# EAGLE board slab-main-pcb-open-source-board-mx-routed (EAGLE 9.7.0)
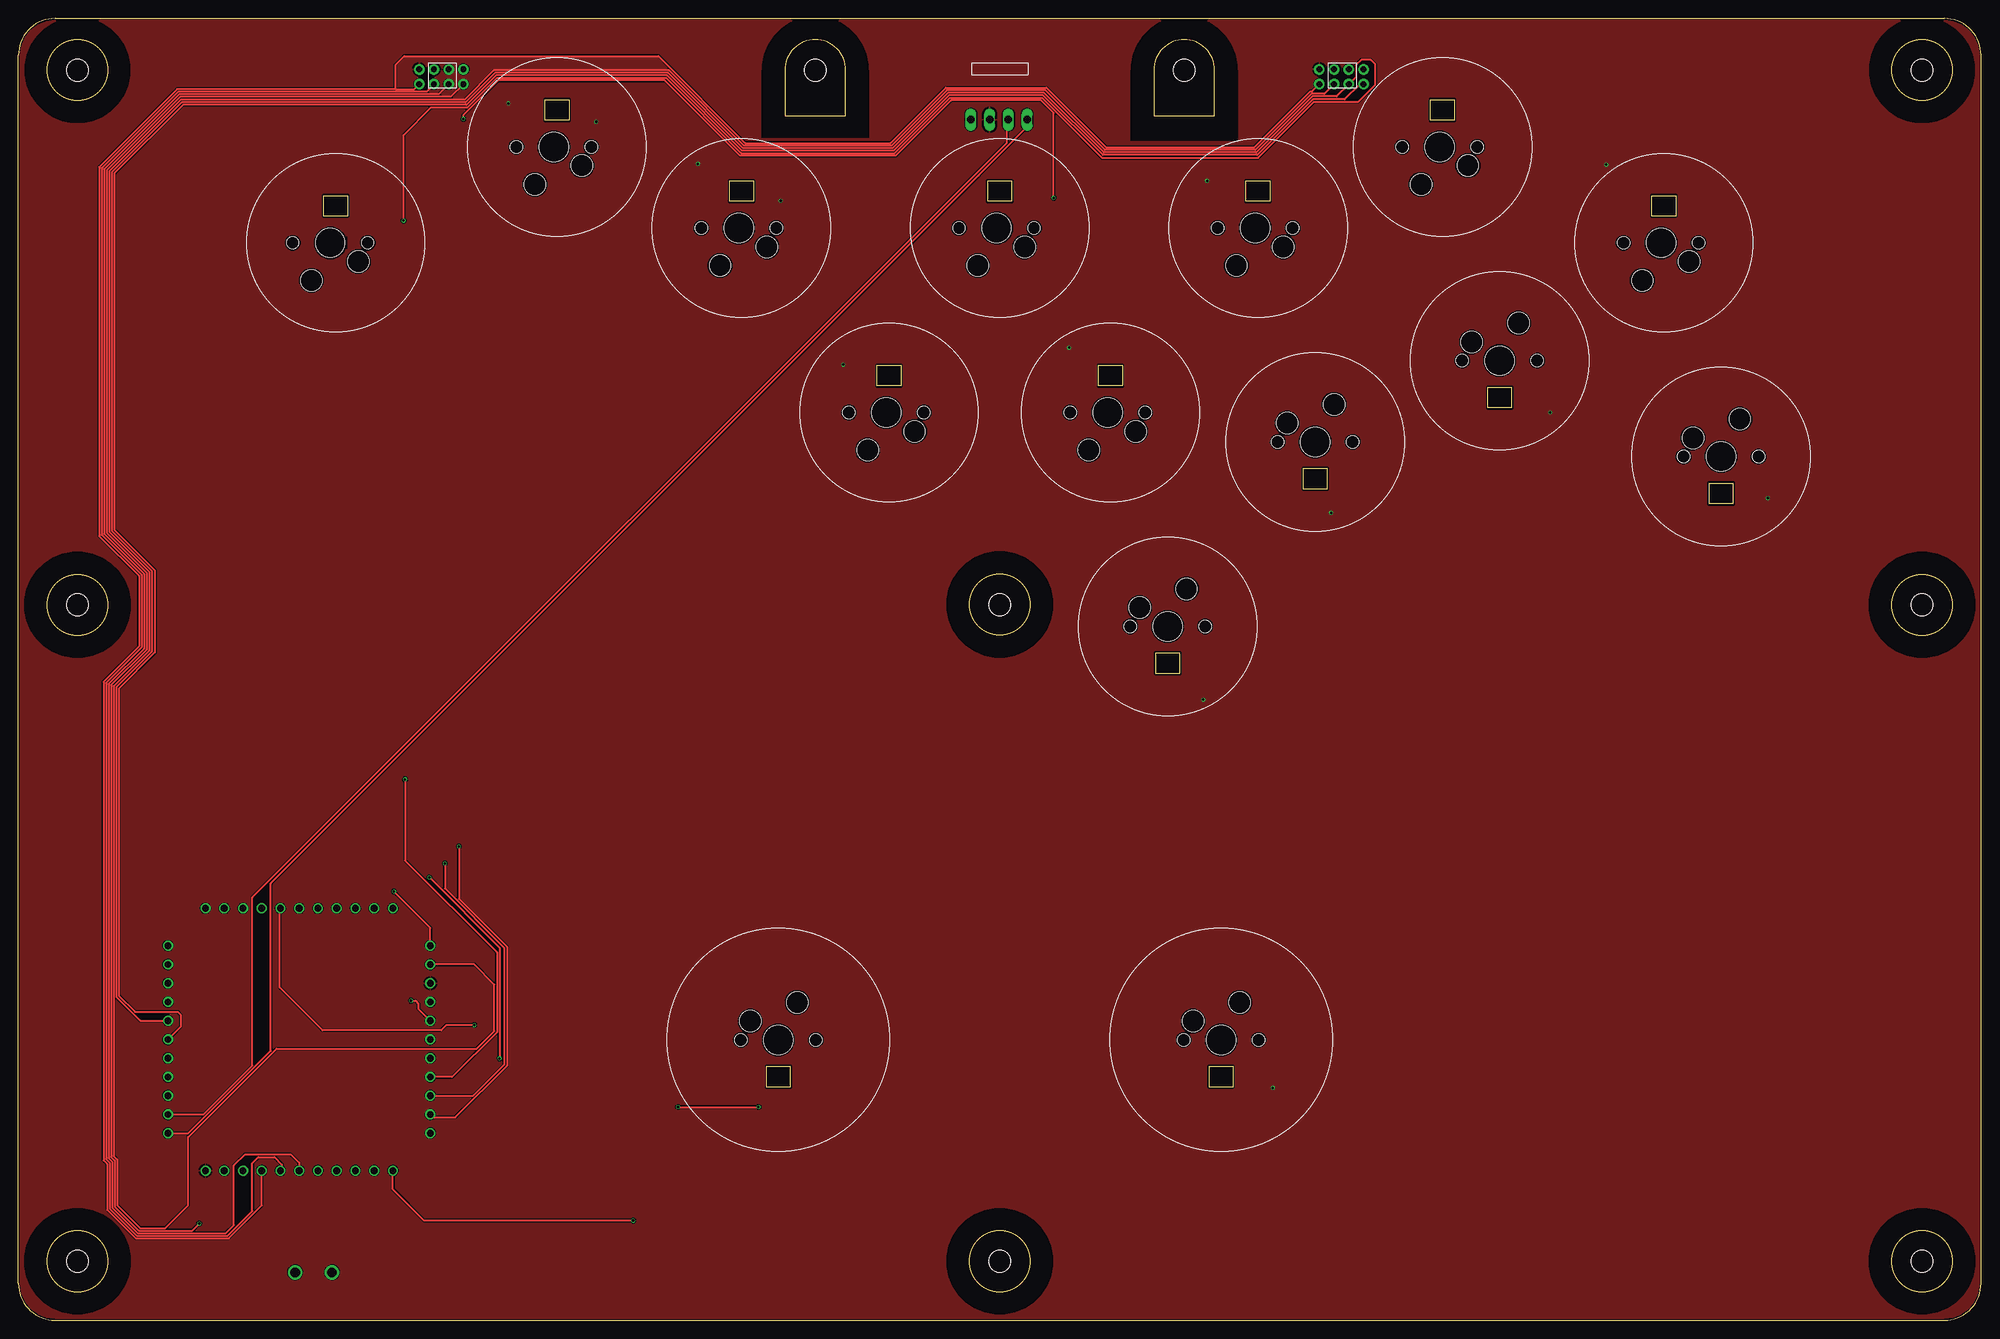
[diagram p0: board, top side]
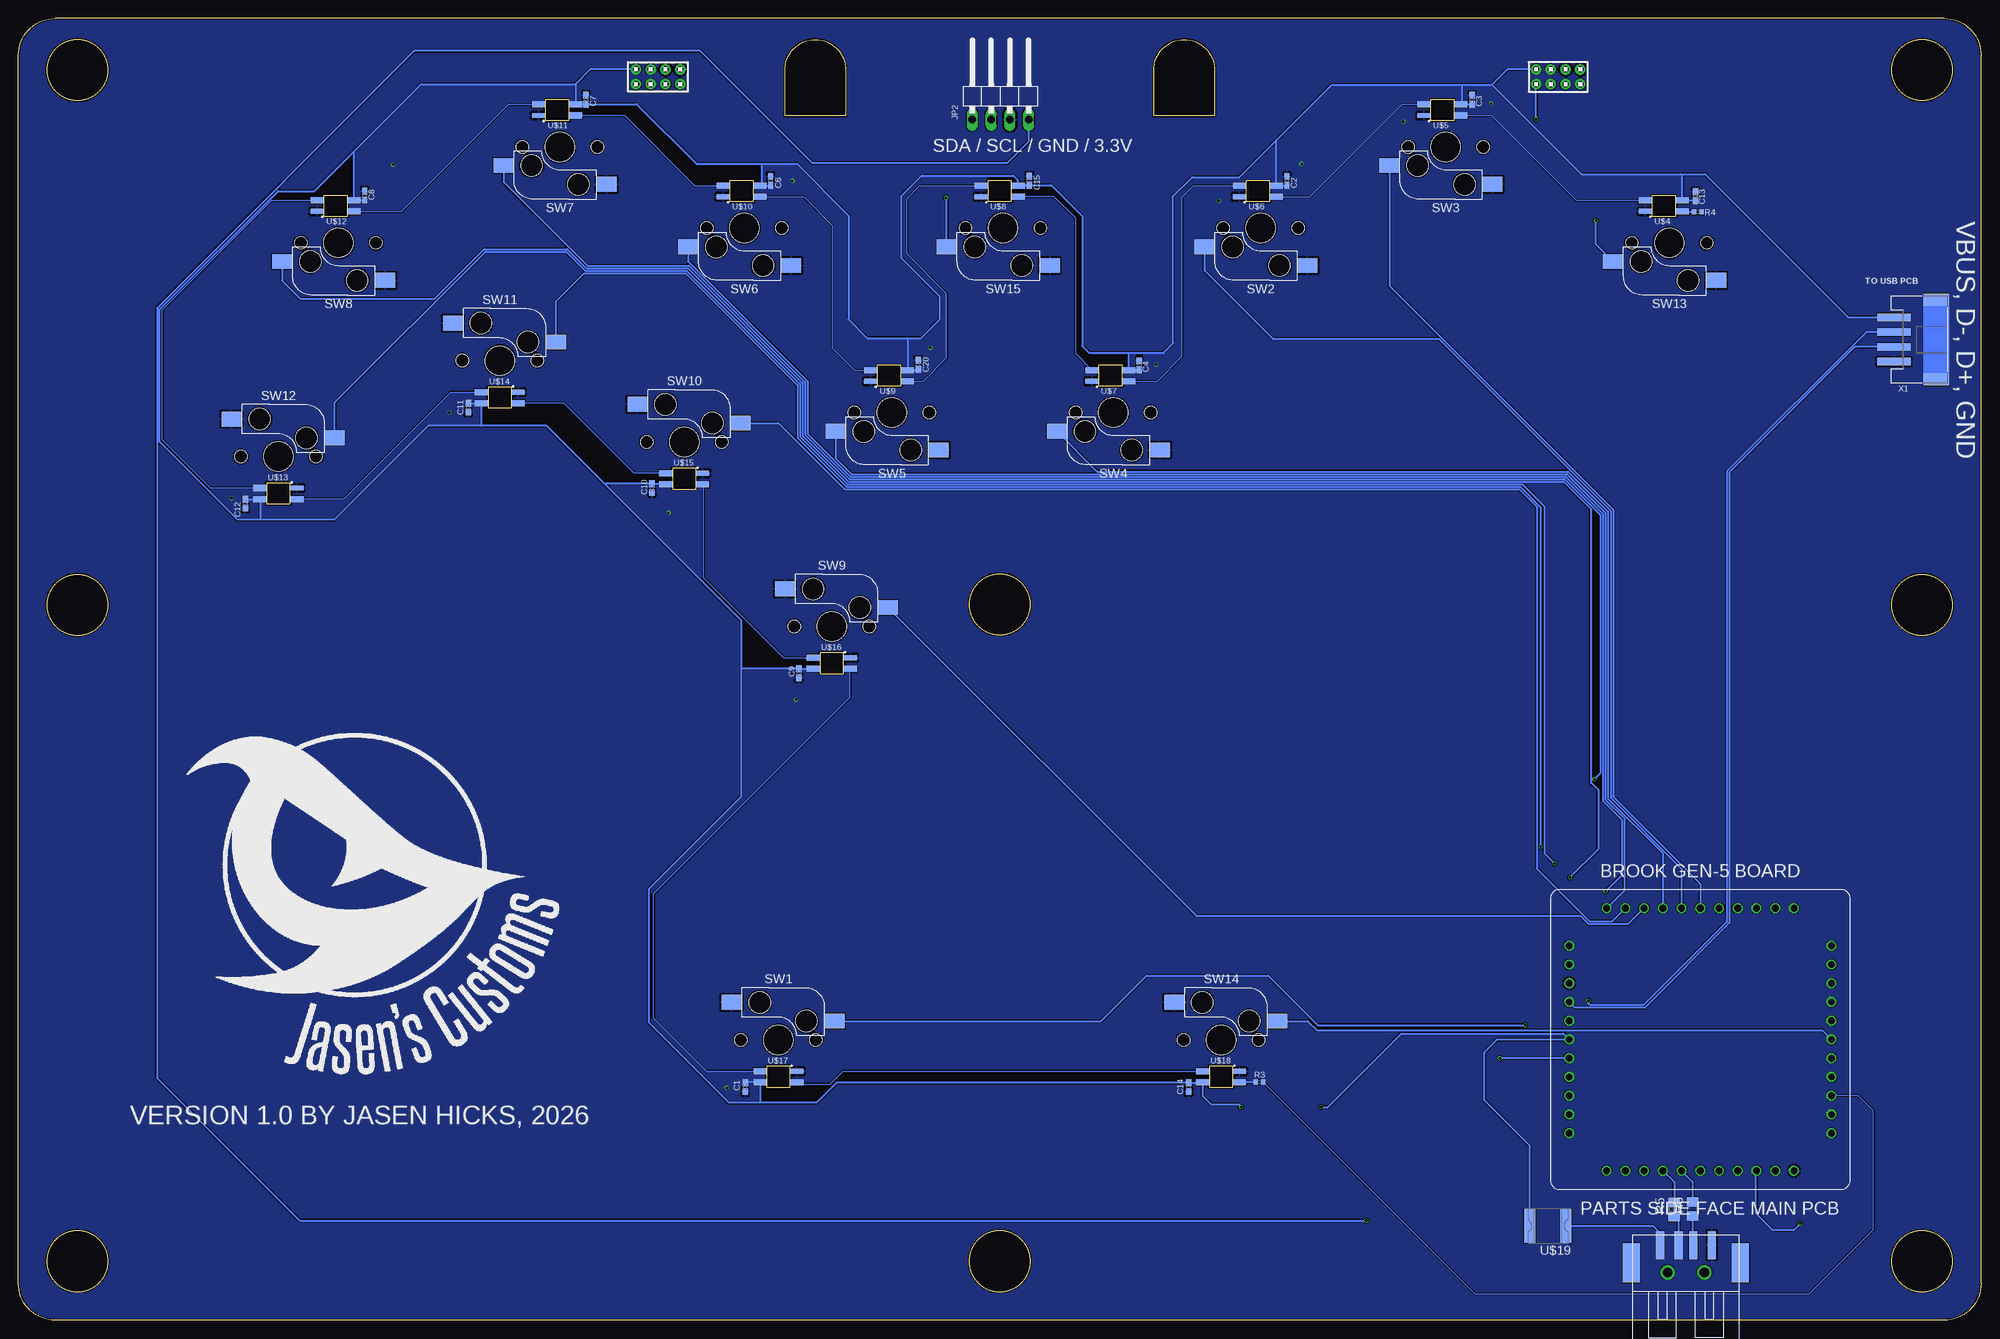
[diagram p1: board, bottom side, seen from below]

Size 266 x 176.4 mm. Coordinates in mm from the lower left corner, seen from the top.
Outline: 162.12,169.4 arc180 153.87,169.4 153.87,163.18 162.12,163.18 162.12,169.4
Outline: 112.12,169.4 arc180 103.87,169.4 103.87,163.18 112.12,163.18 112.12,169.4
Outline: 266,171.4 arc90 261,176.4 5,176.4 arc90 0,171.4 0,5 arc90 5,0 261,0 arc90 266,5 266,171.4
Outline: circle at 8,169.4 radius 4.12
Outline: circle at 258,169.4 radius 4.12
Outline: circle at 258,96.94 radius 4.12
Outline: circle at 258,8 radius 4.12
Outline: circle at 133,8 radius 4.12
Outline: circle at 8,8 radius 4.12
Outline: circle at 133,97 radius 4.12
Outline: circle at 8,96.94 radius 4.12
Copper layers (1+2*15+16): Top / Route2 / Route15 / Bottom
Stack-up Default Layer Stack: Top User Defined 0.035mm / Dielectric-2 User Defined 0.2104mm / Route2 User Defined 0.0152mm / Dielectric-1 User Defined 1.065mm / Route15 User Defined 0.0152mm / Dielectric-3 User Defined 0.2104mm / Bottom User Defined 0.035mm
Design rules: minimum copper width classes=1 12mil, minimum copper width 0.09mm, minimum drill size 0.3mm, copper clearance pad_smd to pad_smd 0.15mm, copper clearance pad_smd to via 0.15mm, copper clearance via to via 0.15mm, copper clearance smd to pad (same net) 0.15mm, copper clearance smd to via (same net) 0.15mm, copper clearance smd to smd (same net) 0.15mm, copper clearance wire_polygon to via 0.125mm, copper clearance wire_polygon to pad_smd 0.1mm, copper clearance wire_polygon to wire_polygon 0.09mm, dimension clearance 0.2mm, via restrict clearance 0mil, restrict clearance 0mil, drill distance 0.3mm, keepout clearance 0mil
Net classes: 1 power: width 0.305 mm
RestrictCopper: area 100.7,162.1 to 115.3,176.7; area 150.7,162.1 to 165.3,176.7; area 0.8,0.8 to 15.2,15.2; area 125.8,0.8 to 140.2,15.2; area 250.8,0.8 to 265.2,15.2; area 250.8,89.7 to 265.2,104.1; area 250.8,162.2 to 265.2,176.6; area 0.8,162.2 to 15.2,176.6; area 0.8,89.7 to 15.2,104.1; area 125.8,89.8 to 140.2,104.2; area 150.7,159.7 to 165.3,169.4; area 100.7,160.2 to 115.3,169.4

## Footprints (pad centres in the part's own frame; a part is rotated, then mirrored left to right if it is on the bottom)
C0402K = smd 0.925 x 0.74: 1 -0.6,0; 2 0.6,0
1X04/90 = drill 1.016 long: 1 -3.81,-3.81; 2 -1.27,-3.81; 3 1.27,-3.81; 4 3.81,-3.81
R0402 = smd 0.6 x 0.7: 1 -0.5,0; 2 0.5,0
R0805 = smd 1.3 x 1.5: 1 -0.95,0; 2 0.95,0
SWITCH_SOCKET = smd 2.7 x 2 bottom: 1 6.355,5.08; 2 -7.625,2.54 | hole 4: 0,0 | hole 2.93: -3.81,2.54; 2.54,5.08 | hole 1.7: -5.08,0; 5.08,0
2X4 = drill 0.8 pad 1.422: 1 0,0; 2 0,2; 3 2,0; 4 2,2; 5 4,0; 6 4,2; 7 6,0; 8 6,2
BROOK-GEN5X-SMALLPCB = drill 0.9: P$1 -17.78,12.7; P$2 -17.78,10.16; P$3 -17.78,7.62; P$4 -17.78,5.08; P$5 -17.78,2.54; P$6 -17.78,0; P$7 -17.78,-2.54; P$8 -17.78,-5.08; P$9 -17.78,-7.62; P$10 -17.78,-10.16; P$11 -17.78,-12.7; P$12 -12.7,-17.78; P$13 -10.16,-17.78; P$14 -7.62,-17.78; P$15 -5.08,-17.78; P$16 -2.54,-17.78; P$17 0,-17.78; P$18 2.54,-17.78; P$19 5.08,-17.78; P$20 7.62,-17.78; P$21 10.16,-17.78; P$22 12.7,-17.78; P$23 17.78,-12.7; P$24 17.78,-10.16; P$25 17.78,-7.62; P$26 17.78,-5.08; P$27 17.78,-2.54; P$28 17.78,0; P$29 17.78,2.54; P$30 17.78,5.08; P$31 17.78,7.62; P$32 17.78,10.16; P$33 17.78,12.7; P$34 12.7,17.78; P$35 10.16,17.78; P$36 7.62,17.78; P$37 5.08,17.78; P$38 2.54,17.78; P$39 0,17.78; P$40 -2.54,17.78; P$41 -5.08,17.78; P$42 -7.62,17.78; P$43 -10.16,17.78; P$44 -12.7,17.78
C5149201-REVERSEMOUNTLED = smd 1.8 x 0.82 bottom: P$1 2.5,-0.75; P$2 2.5,0.75; P$3 -2.5,0.75; P$4 -2.5,-0.75
MF-SMDF050 = smd 1.5 x 4.6: 1 -2.45,0; 2 2.45,0
USB-302S = drill 1.3: P$1 -2.5,0; P$2 2.5,0 | smd 2.3 x 5.3: P$3 -7.4,1.3; P$4 7.4,1.3 | smd 1.1 x 3.8: P$5 -3.5,3.7; P$6 -1,3.7; P$7 1,3.7; P$8 3.5,3.7
S4B-PH-SM4-TB = smd 1 x 4.5: 1 3,0; 2 1,0; 3 -1,0; 4 -3,0 | smd 1.6 x 3.4: M1 5.4,5.75; M2 -5.4,5.75

## Placement (x,y rotation side)
C1  .1uF  [C0402K]  167.5,31.59 90 bottom
C2  .1uF  [C0402K]  94.08,154.39 270 bottom
C3  .1uF  [C0402K]  68.99,165.37 270 bottom
C4  .1uF  [C0402K]  114.08,129.37 270 bottom
C6  .1uF  [C0402K]  164.06,154.39 270 bottom
C7  .1uF  [C0402K]  189.08,165.39 270 bottom
C8  .1uF  [C0402K]  219.08,152.39 270 bottom
C9  .1uF  [C0402K]  160.24,87.67 90 bottom
C10  .1uF  [C0402K]  180.14,112.77 90 bottom
C11  .1uF  [C0402K]  205.04,123.67 90 bottom
C12  .1uF  [C0402K]  235.25,110.67 90 bottom
C13  .1uF  [C0402K]  38.69,152.31 270 bottom
C14  .1uF  [C0402K]  107.4,31.59 90 bottom
C15  .1uF  [C0402K]  129.01,154.41 270 bottom
C20  .1uF  [C0402K]  144.06,129.47 270 bottom
JP2  [1X04/90]  132.9,166.49 0 bottom
R3  500  [R0402]  97.8,32.3 180 bottom
R4  500  [R0402]  38.38,150.19 180 bottom
R5  22  [R0805]  41.6,15 90 bottom
R6  22  [R0805]  39.1,15.1 90 bottom
SW1  KAILH_SWITCH_SOCKET  [SWITCH_SOCKET]  163,38 0 top
SW2  KAILH_SWITCH_SOCKET  [SWITCH_SOCKET]  97.64,148 180 top
SW3  KAILH_SWITCH_SOCKET  [SWITCH_SOCKET]  72.55,159 180 top
SW4  KAILH_SWITCH_SOCKET  [SWITCH_SOCKET]  117.64,123 180 top
SW5  KAILH_SWITCH_SOCKET  [SWITCH_SOCKET]  147.62,123 180 top
SW6  KAILH_SWITCH_SOCKET  [SWITCH_SOCKET]  167.62,148 180 top
SW7  KAILH_SWITCH_SOCKET  [SWITCH_SOCKET]  192.64,159 180 top
SW8  KAILH_SWITCH_SOCKET  [SWITCH_SOCKET]  222.64,146 180 top
SW9  KAILH_SWITCH_SOCKET  [SWITCH_SOCKET]  155.76,94.03 0 top
SW10  KAILH_SWITCH_SOCKET  [SWITCH_SOCKET]  175.76,119.03 0 top
SW11  KAILH_SWITCH_SOCKET  [SWITCH_SOCKET]  200.76,130.03 0 top
SW12  KAILH_SWITCH_SOCKET  [SWITCH_SOCKET]  230.76,117.03 0 top
SW13  KAILH_SWITCH_SOCKET  [SWITCH_SOCKET]  42.25,146 180 top
SW14  KAILH_SWITCH_SOCKET  [SWITCH_SOCKET]  103,38 0 top
SW15  KAILH_SWITCH_SOCKET  [SWITCH_SOCKET]  132.57,148 180 top
U$1  2X4  [2X4]  60.31,167.5 0 bottom
U$2  2X4  [2X4]  182.31,167.5 0 bottom
U$3  BROOK-GEN5X-MINIPCB  [BROOK-GEN5X-SMALLPCB]  38.05,38.05 0 bottom
U$4  C5149201-SK6812MINI  [C5149201-REVERSEMOUNTLED]  43,151 0 top
U$5  C5149201-SK6812MINI  [C5149201-REVERSEMOUNTLED]  73,164 0 top
U$6  C5149201-SK6812MINI  [C5149201-REVERSEMOUNTLED]  98,153 0 top
U$7  C5149201-SK6812MINI  [C5149201-REVERSEMOUNTLED]  118,128 0 top
U$8  C5149201-SK6812MINI  [C5149201-REVERSEMOUNTLED]  133,153 0 top
U$9  C5149201-SK6812MINI  [C5149201-REVERSEMOUNTLED]  148,128 0 top
U$10  C5149201-SK6812MINI  [C5149201-REVERSEMOUNTLED]  168,153 0 top
U$11  C5149201-SK6812MINI  [C5149201-REVERSEMOUNTLED]  193,164 0 top
U$12  C5149201-SK6812MINI  [C5149201-REVERSEMOUNTLED]  223,151 0 top
U$13  C5149201-SK6812MINI  [C5149201-REVERSEMOUNTLED]  230.76,112.02 180 top
U$14  C5149201-SK6812MINI  [C5149201-REVERSEMOUNTLED]  200.76,125.02 180 top
U$15  C5149201-SK6812MINI  [C5149201-REVERSEMOUNTLED]  175.76,114.02 180 top
U$16  C5149201-SK6812MINI  [C5149201-REVERSEMOUNTLED]  155.76,89.02 180 top
U$17  C5149201-SK6812MINI  [C5149201-REVERSEMOUNTLED]  163,33 180 top
U$18  C5149201-SK6812MINI  [C5149201-REVERSEMOUNTLED]  103,33 180 top
U$19  MF-SMDF050  [MF-SMDF050]  58.7,12.8 180 bottom
U$20  USB-302S  [USB-302S]  40,6.5 0 bottom
X1  S4B-PH-SM4-TB  [S4B-PH-SM4-TB]  11.8,132.9 270 bottom

## Library data of the parts
C1-C4 C6-C15 C20 = rcl; SPICEPREFIX: C
JP2 = pinhead
R3-R6 = rcl; SPICEPREFIX: R
SW1-SW15 = Kailh_switch_socket
U$1 U$2 = headers(2mm)(samtec)
U$3 = BrookGen5PCB
U$4-U$18 = C5149201 - SK6812MINI-E
U$19 = fuse
U$20 = USB-302S
X1 = con-JST PH

## Nets
+3V3 [power]: JP2.4 U$3.P$12
AUXBOARD_LED: U$2.4
D_N: U$3.P$5 X1.3
D_P: U$3.P$4 X1.2
DOWN: SW2.2 U$3.P$40
FN: U$2.5 U$3.P$2
GND: C1.1 C2.1 C3.1 C4.1 C6.1 C7.1 C8.1 C9.1 C10.1 C11.1 C12.1 C13.1 C14.1 C15.1 C20.1 JP2.3 SW1.1 SW2.1 SW3.1 SW4.1 SW5.1 SW6.1 SW7.1 SW8.1 SW9.1 SW10.1 SW11.1 SW12.1 SW13.1 SW14.1 SW15.1 U$1.6 U$1.8 U$2.6 U$2.8 U$3.P$3 U$3.P$22 U$4.P$1 U$5.P$1 U$6.P$1 U$7.P$1 U$8.P$1 U$9.P$1 U$10.P$1 U$11.P$1 U$12.P$1 U$13.P$1 U$14.P$1 U$15.P$1 U$16.P$1 U$17.P$1 U$18.P$1 U$20.P$8 X1.1
GP24: R6.2 U$3.P$16
GP25: R5.2 U$3.P$15
HOME: U$1.7 U$2.7 U$3.P$19
K1: SW9.2 U$3.P$42
K2: SW10.2 U$3.P$43
K3: SW11.2 U$3.P$10
K4: SW12.2 U$3.P$9
L3: SW13.2 U$2.3 U$3.P$29
LEFT: SW3.2 U$3.P$39
N$1: U$17.P$2 U$18.P$4
N$2: U$16.P$2 U$17.P$4
N$3: U$19.1 U$20.P$5
N$4: U$15.P$2 U$16.P$4
N$5: U$14.P$2 U$15.P$4
N$6: U$13.P$2 U$14.P$4
N$7: U$12.P$2 U$13.P$4
N$8: R5.1 U$20.P$6
N$9: R6.1 U$20.P$7
N$10: U$11.P$2 U$12.P$4
N$11: U$10.P$2 U$11.P$4
N$12: U$9.P$2 U$10.P$4
N$13: U$8.P$2 U$9.P$4
N$14: R4.2 U$4.P$4
N$15: R3.2 U$18.P$2
N$18: U$7.P$2 U$8.P$4
N$19: U$6.P$2 U$7.P$4
N$20: U$5.P$2 U$6.P$4
N$21: U$4.P$2 U$5.P$4
N$77: U$1.4
P1: SW5.2 U$3.P$44
P2: SW6.2 U$3.P$1
P3: SW7.2 U$3.P$8
P4: SW8.2 U$3.P$7
R3: SW14.2 U$2.1 U$3.P$28
RGB: R3.1 U$3.P$25
RIGHT: SW4.2 U$3.P$41
SCL: JP2.2 U$3.P$24
SDA: JP2.1 U$3.P$23
SELECT: U$1.3 U$3.P$17
START: U$1.5 U$3.P$18
TP: SW15.2 U$1.1 U$3.P$20
UP: SW1.2 U$3.P$38
VBUS: C1.2 C2.2 C3.2 C4.2 C6.2 C7.2 C8.2 C9.2 C10.2 C11.2 C12.2 C13.2 C14.2 C15.2 C20.2 U$1.2 U$2.2 U$3.P$6 U$4.P$3 U$5.P$3 U$6.P$3 U$7.P$3 U$8.P$3 U$9.P$3 U$10.P$3 U$11.P$3 U$12.P$3 U$13.P$3 U$14.P$3 U$15.P$3 U$16.P$3 U$17.P$3 U$18.P$3 U$19.2 X1.4

## Tracks (layer width: path | path; a pad name or v marks a point on that pad's centre or on a via)
+3V3  (via drill 0.35)
  Top 0.305: v83.3,13.5 55,13.5 50.75,17.75 U$3.P$12
  Bottom 0.305: JP2.4 129.09,159.71 132,156.8 158.4,156.8 173.6,172 212.34,172 247.2,137.13 247.2,32.8 227.9,13.5 v83.3,13.5
D_N  (via drill 0.35)
  Top 0.254: v53.2,43.3 53.8,43.3 54.2,42.9 54.2,42.22 U$3.P$5
  Bottom 0.254: X1.3 15.59,133.9 34.44,115.04 34.44,54 45.74,42.7 52.99,42.7 53.2,42.91 v53.2,43.3
D_P
  Bottom 0.254: X1.2 17.1,131.9 34.1,114.9 34.1,53.85 45.6,42.35 55.05,42.35 U$3.P$4
DOWN
  Bottom 0.254: SW2.2 105.26,142.26 96,133 73.5,133 50.21,109.7 50.21,70.82 40.59,61.2 U$3.P$40
FN
  Top 0.254: U$3.P$2 61.79,48.21 64.5,45.5 64.5,39.2 62.1,36.8 34.97,36.8 23,24.82 23,15.6 19.9,12.5 16.5,12.5 13.4,15.59 13.4,21.76 12.91,22.25 12.91,85.94 17.71,90.74 17.71,101.44 12.31,106.84 12.31,155.68 22.02,165.38 60.44,165.38 64.43,169.37 88.17,169.37 98.37,159.17 118.33,159.17 125.83,166.67 139.17,166.67 147.26,158.58 167.63,158.58 175.23,166.18 177,166.18 U$2.5
GND  (via drill 0.35)
  other vias: 237.1,111.4 170,31.5 111.8,129.5 142.4,131.8 161.1,154.4 160.6,84.1 207.6,123 177.9,109.4 78.3,162.4 66.4,164.9 103.3,151.7 92.1,156.7 215.2,156.6
  pour Top: -2,0 266,0 266,181 266,178 -1,178
  pour Bottom: -3,180 273,180 273,-8 -2,-8 -2,-3
GP24
  Bottom 0.254: U$3.P$16 39.1,18.78 R6.2
GP25
  Bottom 0.254: U$3.P$15 41.6,18.74 R5.2
HOME
  Top 0.254: U$3.P$19 32.97,15.57 28.5,11.1 15.9,11.1 12.03,14.97 12.03,21.19 11.54,21.68 11.54,86.51 16.34,91.31 16.34,100.87 10.94,106.27 10.94,156.25 21.51,166.83 51.1,166.83 | U$1.7 53.64,166.83 51.1,166.83 | 51.1,166.83 51.1,170.1 52.3,171.3 86.73,171.3 98.51,159.52 118.19,159.52 125.69,167.02 139.31,167.02 147.4,158.93 167.49,158.93 175.09,166.53 175.34,166.53 U$2.7
K1
  Bottom 0.254: SW9.2 106.37,54.8 54.3,54.8 53.2,53.7 47.81,53.7 U$3.P$42
K2
  Bottom 0.254: SW10.2 163,121.57 154.02,112.59 62.59,112.59 60.22,110.21 60.22,61.2 53.06,54.04 50,54.04 U$3.P$43
K3  (via drill 0.35)
  Top 0.254: v59.7,64.2 59.7,57.1 66.2,50.6 66.2,34.5 59.2,27.5 56.22,27.5 U$3.P$10
  Bottom 0.254: SW11.2 193.14,138.07 189.35,141.85 175.56,141.85 160.4,126.7 160.4,119.55 153.78,112.93 62.44,112.93 59.7,110.2 v59.7,64.2
K4  (via drill 0.35)
  Top 0.254: v57.8,61.9 57.8,58.51 65.86,50.45 65.86,34.64 61.65,30.43 U$3.P$9
  Bottom 0.254: SW12.2 223.14,124.38 202.71,144.8 191.78,144.8 189.18,142.2 175.41,142.2 160.06,126.84 160.06,119.69 153.64,113.28 62.18,113.28 59.19,110.28 59.19,63.28 v57.8,61.9
L3  (via drill 0.35)
  Top 0.254: U$3.P$29 16.51,40.59 13.26,43.84 13.26,85.8 18.06,90.6 18.06,101.58 12.66,106.98 12.66,155.54 22.16,165.04 60.59,165.04 64.57,169.03 88.03,169.03 98.23,158.83 118.47,158.83 125.97,166.33 139.03,166.33 147.12,158.24 167.77,158.24 175.37,165.84 178.65,165.84 U$2.3 180.4,167.5 181.3,168.4 181.3,170.1 182,170.8 183.3,170.8 183.9,170.2 183.9,167.4 181.6,165.1 175.6,165.1 168,157.5 146.89,157.5 138.74,165.64 126.26,165.64 118.76,158.14 97.94,158.14 87.74,168.34 64.86,168.34 60.87,164.35 55.96,164.35 52.2,160.6 v52.2,149
  Bottom 0.254: SW13.2 52.2,145.78 v52.2,149
LEFT
  Bottom 0.254: U$3.P$39 38.05,59.15 49.86,70.96 49.86,109.84 80.18,140.16 SW3.2
N$1
  Bottom 0.152: U$18.P$4 154.25,33.75 156,32 160.25,32 U$17.P$2
N$2
  Bottom 0.152: U$17.P$4 172.75,33.75 179.9,40.9 179.9,57.77 | 179.9,57.77 | 179.9,57.77 153.26,84.41 U$16.P$2
N$3
  Bottom 0.254: U$19.1 44.5,12.8 43.4,11.7 43.4,10.3 U$20.P$5
N$4
  Bottom 0.152: U$16.P$4 162.28,89.77 173.2,100.7 173.2,113.27 U$15.P$2
N$5
  Bottom 0.152: U$15.P$4 182.58,114.77 192.08,124.27 U$14.P$2
N$6
  Bottom 0.152: U$14.P$4 207.42,125.77 221.92,111.27 U$13.P$2
N$7
  Bottom 0.152: U$13.P$4 239.98,112.77 246.5,119.3 246.5,136.9 231.65,151.75 U$12.P$2
N$8
  Bottom 0.254: R5.1 41,13.45 U$20.P$6
N$9
  Bottom 0.254: R6.1 39.1,10.3 U$20.P$7
N$10
  Bottom 0.152: U$12.P$4 214.05,150.25 199.55,164.75 U$11.P$2
N$11
  Bottom 0.152: U$11.P$4 183.85,163.25 174.35,153.75 U$10.P$2
N$12
  Bottom 0.152: U$10.P$4 159.55,152.25 155.7,148.4 155.7,131.8 152.65,128.75 U$9.P$2
N$13
  Bottom 0.152: U$9.P$4 143.35,127.25 140.2,130.4 140.2,139.1 145.6,144.5 145.6,152 143.85,153.75 U$8.P$2
N$14
  Bottom 0.152: 38.89,150.2 R4.2 | U$4.P$4 40.45,150.2
  Bottom 0.254: 40.45,150.2 38.89,150.2
N$15
  Bottom 0.254: U$18.P$2 98.35,32.25 R3.2
N$18
  Bottom 0.152: U$8.P$4 125.65,152.25 122.7,149.3 122.7,130.95 U$7.P$2
N$19
  Bottom 0.152: U$7.P$4 111.65,127.25 108.3,130.6 108.3,152.2 106.75,153.75 U$6.P$2
N$20
  Bottom 0.152: U$6.P$4 90.95,152.25 78.45,164.75 U$5.P$2
N$21
  Bottom 0.152: U$5.P$4 66.35,163.25 54.85,151.75 U$4.P$2
P1
  Bottom 0.254: SW5.2 155.25,116.83 153.07,114.65 56.13,114.65 50.89,109.41 50.89,70.53 48.3,67.94 48.3,58.28 U$3.P$44
P2  (via drill 0.35)
  Top 0.254: U$3.P$1 55.83,53.17 v50.9,58.1
  Bottom 0.254: SW6.2 175.25,143.49 159.02,127.27 159.02,120.12 153.21,114.31 56.28,114.31 51.24,109.27 51.24,70.39 48.7,67.85 48.7,60.3 v50.9,58.1
P3  (via drill 0.35)
  Top 0.254: v52.4,73.3 52.4,62.3 64.84,49.85 64.84,39.04 58.77,32.97 U$3.P$8
  Bottom 0.254: SW7.2 200.26,154.26 188.89,142.88 175.13,142.88 159.37,127.12 159.37,119.98 153.35,113.96 56.42,113.96 51.6,109.15 51.6,74.1 v52.4,73.3
P4  (via drill 0.35)
  Top 0.254: v65.2,35.5 65.19,35.51 65.19,50.51 v55.7,60
  Bottom 0.254: SW8.2 230.26,140.86 227.8,138.4 209.6,138.4 202.86,145.14 191.63,145.14 189.03,142.54 175.27,142.54 159.71,126.98 159.71,119.84 153.5,113.62 56.56,113.62 52.91,109.98 52.91,72.88 51.9,71.87 51.9,63.8 v55.7,60 | v65.2,35.5 55.84,35.5 U$3.P$7
R3
  Top 0.254: U$2.1 181.8,167.5 179.74,165.44 175.46,165.44 167.91,157.9 146.97,157.9 138.89,165.98 126.12,165.98 118.62,158.48 98.09,158.48 87.89,168.68 64.72,168.68 60.73,164.7 22.3,164.7 13,155.4 13,107.12 18.5,101.62 18.5,90.5 13.6,85.6 13.6,44 15.8,41.8 21.6,41.8 22,41.4 22,39.78 U$3.P$28
  Bottom 0.254: SW14.2 91.28,40.54 90.04,39.3 21.52,39.3 U$3.P$28
RGB
  Bottom 0.152: R3.1 68.6,3.6 23.3,3.6 14.6,12.3 14.6,28.4 16.63,30.43 U$3.P$25
RIGHT
  Bottom 0.254: SW4.2 119.8,115 55.99,115 50.55,109.56 50.55,70.67 43.13,63.25 U$3.P$41
SCL
  Top 0.254: JP2.2 133.97,162.48 133.97,159.53 133.95,159.55 31.7,57.3 31.7,34.5 25.09,27.89 U$3.P$24
SDA
  Top 0.254: JP2.1 136.71,161.73 130.13,155.15 130.13,155.13 34.2,59.2 34.2,36.51 23.04,25.35 U$3.P$23
SELECT
  Top 0.254: U$3.P$17 38.05,21.35 36.9,22.5 30.7,22.5 29.2,21 29.2,12.9 28.09,11.78 16.19,11.78 12.72,15.25 12.72,21.48 12.22,21.97 12.22,86.22 17.02,91.02 17.02,101.15 11.62,106.55 11.62,155.97 21.8,166.14 56.95,166.14 U$1.3
START
  Top 0.254: U$3.P$18 35.7,20.46 35.7,21.1 34.7,22.1 32.5,22.1 31.7,21.3 31.7,14.8 28.34,11.44 16.04,11.44 12.37,15.11 12.37,21.33 11.88,21.82 11.88,86.37 16.68,91.17 16.68,101.01 11.28,106.41 11.28,156.11 21.66,166.48 55.3,166.48 U$1.5
TP  (via drill 0.35)
  Top 0.254: U$1.1 58.61,165.8 21.94,165.8 11.97,155.82 11.97,106.69 17.37,101.29 17.37,90.88 12.57,86.08 12.57,22.11 13.06,21.62 13.06,15.4 16.3,12.15 23.56,12.15 v24.5,13.1 | v140.3,152.1 140.3,163.6 138.6,165.3 126.4,165.3 118.9,157.8 97.8,157.8 87.6,168 65,168 60.3,163.3 v60.3,162.8
  Bottom 0.254: v24.5,13.1 25.4,12.2 28.2,12.2 30.5,14.5 30.5,20.2 U$3.P$20 | SW15.2 140.19,151.99 v140.3,152.1 | v60.3,162.8 v60.31,162.81 U$1.1
UP  (via drill 0.35)
  Top 0.254: v61.8,40 58,40 57.3,39.3 41.2,39.3 35.4,45.1 35.4,55.72 U$3.P$38
  Bottom 0.254: SW1.2 119.26,40.54 113.1,46.7 96.6,46.7 89.9,40 v61.8,40
VBUS  (via drill 0.35)
  Top 0.254: v89.4,28.9 v100.3,28.9
  Bottom 0.254: C13.2 38.74,151.75 U$4.P$3 40.5,155.1 40.7,155.3 | C3.2 69.02,164.75 U$5.P$3 70.3,164.95 70.3,167.4 | C2.2 94.12,153.75 U$6.P$3 95.5,159.9 | C4.2 114.1,128.75 U$7.P$3 115.5,130.9 115.7,131.1 | C20.2 144.19,128.75 U$9.P$3 145.5,133.1 | C6.2 164.1,153.75 U$10.P$3 165.3,153.95 165.3,156.7 | C12.2 U$13.P$3 233.26,108.5 | C11.2 U$14.P$3 203.26,121.2 | U$15.P$3 180.04,113.27 C10.2 186.43,113.37 186.5,113.3 | U$16.P$3 C9.2 167.93,88.27 168,88.2 | C1.2 167.44,32.25 U$17.P$3 165.5,29.6 165.6,29.5 | 165.6,29.5 157.8,29.5 155.1,32.19 C14.2 105.56,32.19 U$18.P$3 105.5,30.4 104.36,29.26 100.66,29.26 v100.3,28.9 | 165.6,29.5 169.7,29.5 180.5,40.3 180.5,58.5 168,71 168,88.2 | 168,88.2 168,94.8 186.5,113.3 | 186.5,113.3 194.4,121.2 203.26,121.2 | 203.26,121.2 210.5,121.2 223.2,108.5 233.26,108.5 | 233.26,108.5 236.3,108.5 246.83,119.03 246.83,136.98 230.82,153 225.9,153 220.5,158.4 | 220.5,158.4 211.4,167.5 190.5,167.5 | U$2.2 188.5,169.5 190.5,167.5 | 165.3,156.7 174.1,156.7 182.19,164.79 C7.2 189.12,164.75 U$11.P$3 190.5,167.5 | 165.3,156.7 160.5,156.7 153.5,149.7 153.5,135.64 150.96,133.1 145.5,133.1 | 145.5,133.1 143.64,133.1 141.1,135.64 141.1,138.7 146.3,143.9 146.3,152.4 143.6,155.1 131.14,155.1 130.5,154.46 U$8.P$3 129.06,153.75 C15.2 129,153.8 126,153.8 121.8,149.6 121.8,132 120.9,131.1 115.7,131.1 | 95.5,159.9 100.5,154.9 106.9,154.9 109.5,152.3 109.5,132.4 110.8,131.1 115.7,131.1 | 95.5,159.9 88,167.4 70.3,167.4 | 70.3,167.4 66.3,167.4 | 66.3,167.4 54.2,155.3 40.7,155.3 | 40.7,155.3 37.4,155.3 18,135.9 X1.4 | v89.4,28.9 88.5,28.9 78.55,38.85 56.63,38.85 U$3.P$6 65.55,38.05 67.3,36.3 67.3,29.8 61.15,23.65 U$19.2
  Bottom 0.254: C8.2 219.12,151.75 U$12.P$3 220.5,158.4 | U$1.2 64.2,169.5 66.3,167.4
(copper drawn outside any net)
  shapes: Bottom area x1, Route15 area x15, Route2 area x15, Top area x15

## Text on the board
bNames: SDA / SCL / GND / 3.3V | TO USB PCB | VBUS, D-, D+, GND | VERSION 1.0 BY JASEN HICKS, 2026